# EAGLE board VoltageControlledEuclideanSequencer (EAGLE 6.6.0)
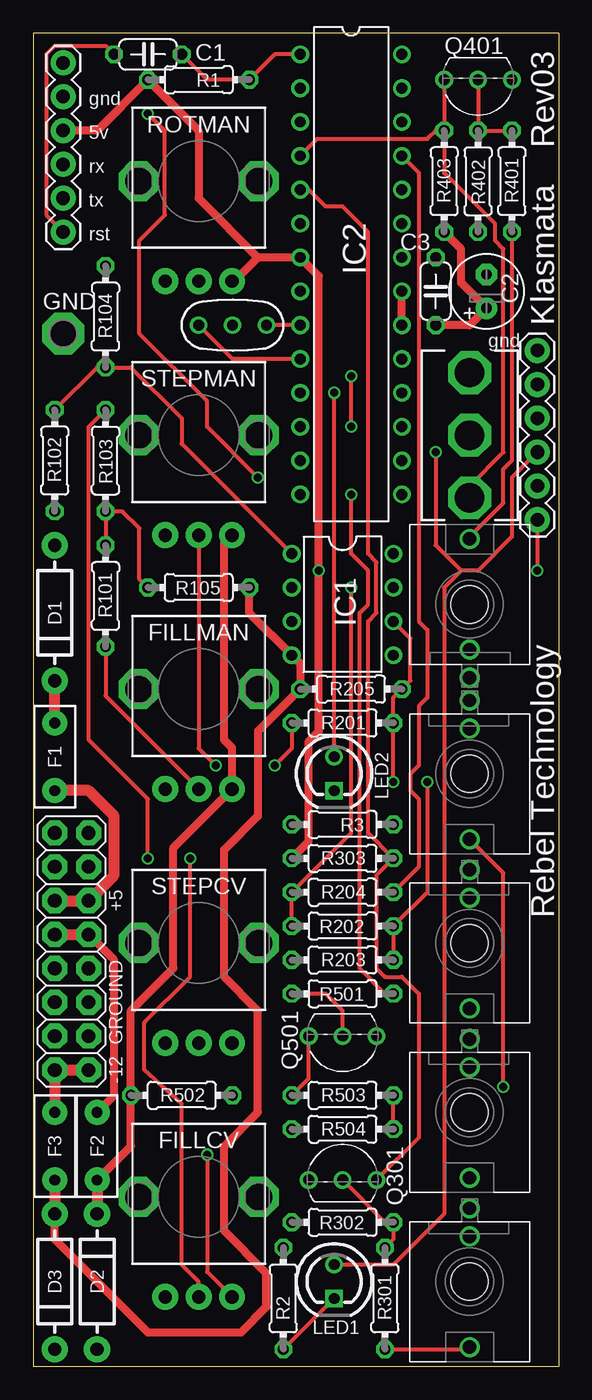
[diagram p0: board, top side]
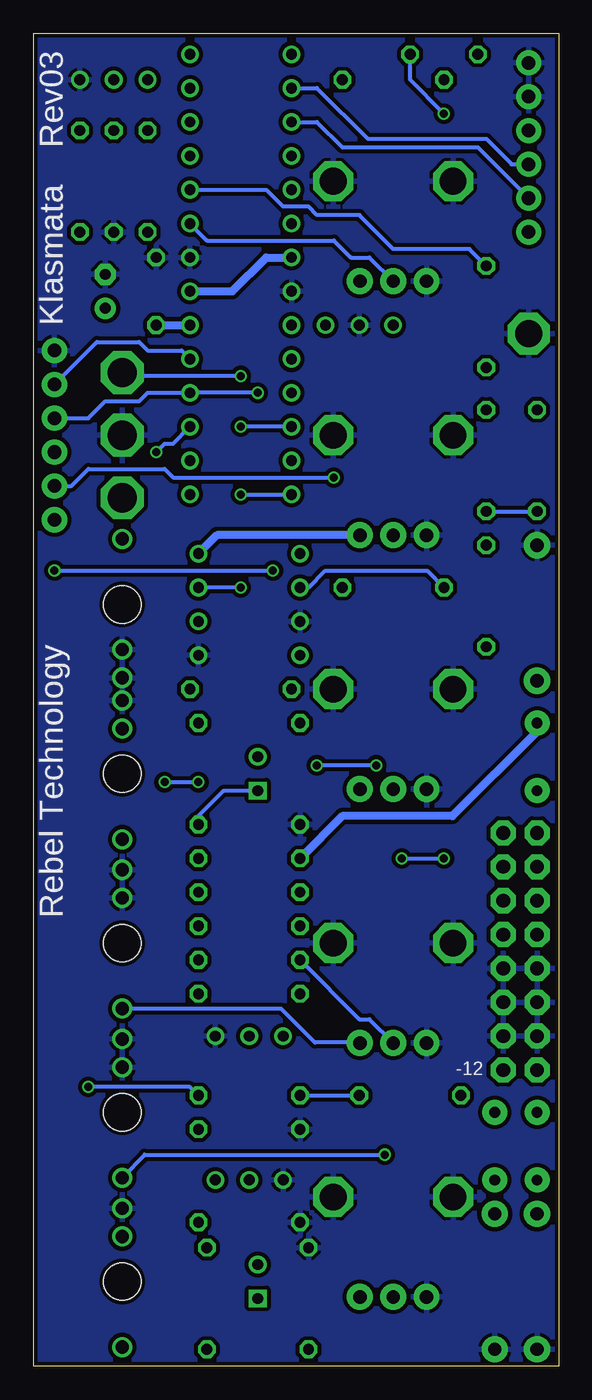
[diagram p1: board, bottom side, seen from below]

Size 39.39 x 100 mm. Coordinates in mm from the lower left corner, seen from the top.
Outline: 39.39,100 0,100 0,0 39.39,0 39.39,100
Copper layers (1*16): Top 0.035mm / dielectric 1.5mm / Bottom 0.035mm
Design rules "Fusion_eagle_rule_v1.1": minimum track width 6mil, minimum drill 12mil, track to track 6mil, track to pad 6mil, pad to pad 6mil, via to via 6mil, smd to smd 0mil, copper to edge 10mil, drill to drill 10mil, minimum pad ring 10mil, minimum via ring 6mil, stop-mask expansion 2mil, vias tented up to drill 100mil, thermal gap 10mil

## Footprints (pad centres in the part's own frame; a part is rotated, then mirrored left to right if it is on the bottom)
C050-024X044 = drill 0.813 octagon: 1 -2.54,0; 2 2.54,0
E2,5-6 = drill 0.813 pad 1.6: + -1.27,0 | drill 0.813 pad 1.6 octagon: - 1.27,0
THONKICONN = drill 1: P$1 0,-5.5; P$2 0,-3.38; P$3 0,4.92 | hole 2.8: 0,0
DIODE-1N4001 = drill 1 pad 1.981: A -5.08,0; C 5.08,0
PTC = drill 0.8 pad 1.88: P$1 -2.54,0; P$2 2.54,0
POT-ALPS-RK09L1140 = drill 1 pad 1.93: 1 -2.5,-7.5; 2 0,-7.5; 3 2.5,-7.5 | drill 2 octagon: P$5 -4.5,0; P$6 4.5,0
P1-20 = drill 2.007 pad 3.15 octagon: TP 0,0
DIL08 = drill 0.813 pad 1.27: 1 -3.81,-3.81; 2 -1.27,-3.81; 3 1.27,-3.81; 4 3.81,-3.81; 5 3.81,3.81; 6 1.27,3.81; 7 -1.27,3.81; 8 -3.81,3.81
DIL28-3 = drill 0.813: 1 -16.51,-3.81; 2 -13.97,-3.81; 3 -11.43,-3.81; 4 -8.89,-3.81; 5 -6.35,-3.81; 6 -3.81,-3.81; 7 -1.27,-3.81; 8 1.27,-3.81; 9 3.81,-3.81; 10 6.35,-3.81; 11 8.89,-3.81; 12 11.43,-3.81; 13 13.97,-3.81; 14 16.51,-3.81; 15 16.51,3.81; 16 13.97,3.81; 17 11.43,3.81; 18 8.89,3.81; 19 6.35,3.81; 20 3.81,3.81; 21 1.27,3.81; 22 -1.27,3.81; 23 -3.81,3.81; 24 -6.35,3.81; 25 -8.89,3.81; 26 -11.43,3.81; 27 -13.97,3.81; 28 -16.51,3.81
1X06 = drill 1.016 pad 1.88: 1 0,0; 2 2.54,0; 3 5.08,0; 4 7.62,0; 5 10.16,0; 6 12.7,0
LED3MM = drill 0.813: A -1.27,0 | drill 0.813 square: K 1.27,0
TO92-EBC = drill 0.813: B 0,-1.27; C 2.54,-1.27; E -2.54,-1.27
0204/7 = drill 0.813 octagon: 1 -3.81,0; 2 3.81,0
SWITCH-SPDT-SALECOM-T8014 = drill 2.2 octagon: 1 0,4.699; 2 0,0; 3 0,-4.699
2X8 = drill 1.016 pad 1.88 octagon: 1 0,0; 2 0,2.54; 3 2.54,0; 4 2.54,2.54; 5 5.08,0; 6 5.08,2.54; 7 7.62,0; 8 7.62,2.54; 9 10.16,0; 10 10.16,2.54; 11 12.7,0; 12 12.7,2.54; 13 15.24,0; 14 15.24,2.54; 15 17.78,0; 16 17.78,2.54
RESONATOR-PTH = drill 0.8: 1 -2.54,0; 2 0,0; 3 2.54,0

## Placement (x,y rotation side)
C1  100n  [C050-024X044]  8.59,98.42 0 top
C2  10u  [E2,5-6]  33.99,80.64 90 top
C3  100n  [C050-024X044]  30.18,80.64 90 top
CLKIN  THONKICONN  [THONKICONN]  32.72,6.35 180 top
D1  [DIODE-1N4001]  1.6,56.52 270 top
D2  [DIODE-1N4001]  4.78,6.35 90 top
D3  [DIODE-1N4001]  1.6,6.35 270 top
DIVOUT  THONKICONN  [THONKICONN]  32.72,44.45 180 top
F1  PTCPTH  [PTC]  1.6,45.72 90 top
F2  PTCPTH  [PTC]  4.78,16.51 270 top
F3  PTCPTH  [PTC]  1.6,16.51 90 top
FILL  THONKICONN  [THONKICONN]  32.72,19.05 180 top
FILLCV  POT-ALPS-RK09L1140  [POT-ALPS-RK09L1140]  12.4,12.7 0 top
FILLMAN  POT-ALPS-RK09L1140  [POT-ALPS-RK09L1140]  12.4,50.8 0 top
GND  TPPAD1-20  [P1-20]  2.24,77.47 0 top
IC1  TL072P  [DIL08]  23.2,57.15 270 top
IC2  MEGA168  [DIL28-3]  23.83,81.92 270 top
JP1  [1X06]  2.24,97.79 270 top
JP3  [1X06]  37.8,76.2 270 top
LED1  [LED3MM]  22.56,6.35 270 top
LED2  [LED3MM]  22.56,44.45 270 top
Q301  [TO92-EBC]  23.2,15.24 0 top
Q401  [TO92-EBC]  33.36,95.25 180 top
Q501  [TO92-EBC]  23.2,23.5 180 top
R1  10K  [0204/7]  12.4,96.52 180 top
R2  1K  [0204/7]  18.75,5.08 90 top
R3  1K  [0204/7]  23.2,40.64 180 top
R101  120K  [0204/7]  5.42,57.78 90 top
R102  51K  [0204/7]  1.6,67.94 90 top
R103  51K  [0204/7]  5.42,67.94 270 top
R104  51K  [0204/7]  5.42,78.74 90 top
R105  120K  [0204/7]  12.4,58.42 180 top
R201  120K  [0204/7]  23.2,48.26 0 top
R202  51K  [0204/7]  23.2,33.02 180 top
R203  51K  [0204/7]  23.2,30.48 0 top
R204  51K  [0204/7]  23.2,35.56 0 top
R205  120K  [0204/7]  23.83,50.8 0 top
R301  100K  [0204/7]  26.37,5.08 90 top
R302  1M  [0204/7]  23.2,10.79 180 top
R303  10K  [0204/7]  23.2,38.1 0 top
R401  100K  [0204/7]  35.9,88.9 90 top
R402  1M  [0204/7]  33.36,88.9 270 top
R403  10K  [0204/7]  30.81,88.9 90 top
R501  1K  [0204/7]  23.2,27.94 180 top
R502  1K  [0204/7]  11.13,20.32 0 top
R503  100  [0204/7]  23.2,20.32 0 top
R504  1K  [0204/7]  23.2,17.78 0 top
ROTMAN  POT-ALPS-RK09L1140  [POT-ALPS-RK09L1140]  12.4,88.9 0 top
RSTIN  THONKICONN  [THONKICONN]  32.72,57.15 0 top
S1  [SWITCH-SPDT-SALECOM-T8014]  32.72,69.85 0 top
STEP  THONKICONN  [THONKICONN]  32.72,31.75 180 top
STEPCV  POT-ALPS-RK09L1140  [POT-ALPS-RK09L1140]  12.4,31.75 0 top
STEPMAN  POT-ALPS-RK09L1140  [POT-ALPS-RK09L1140]  12.4,69.85 0 top
U$1  [RT-LOGO-REBEL-BL]  9.86,59.69 270 top
U$2  M08X2  [2X8]  4.15,22.23 90 top
U$3  [RT-LOGO-TECH-BL]  9.86,72.39 270 top
Y1  16Mhz  [RESONATOR-PTH]  14.94,78.11 180 top

## Library data of the parts
C1 C3 = rcl
C2 = resistor
CLKIN D1-D3 DIVOUT F1-F3 FILL FILLCV FILLMAN LED1 LED2 R1-R3 R101-R105 R201-R205 R301-R303 R401-R403 R501-R504 ROTMAN RSTIN S1 STEP STEPCV STEPMAN U$1 U$3 = Rebel
GND = testpad
IC1 = linear
IC2 = atmel; OC_FARNELL: unknown; OC_NEWARK: unknown
JP1 JP3 U$2 Y1 = SparkFun
Q301 Q401 Q501 = transistor-neu-to92

## Nets
+5V: C2.+ C3.1 D1.C F1.P$2 IC2.7 IC2.20 IC2.21 JP1.3 JP3.6 R1.2 R303.1 R403.1 ROTMAN.3
+12V: D2.C F2.P$2 FILLMAN.3 IC1.8 R502.1 STEPMAN.3
-12V: D3.A F3.P$1 IC1.4 R105.1 R205.1
ALT: IC2.11
CLKIN: IC2.5 Q301.C R303.2
CMBOUT: IC2.16
DELOUT: IC2.15
FILL: IC2.24 R104.2
GND: C2.- C3.2 CLKIN.P$1 D1.A D2.A D3.C DIVOUT.P$1 FILL.P$1 FILL.P$2 FILLCV.1 FILLCV.P$5 FILLCV.P$6 FILLMAN.1 FILLMAN.P$5 FILLMAN.P$6 GND.TP IC1.3 IC1.5 IC2.8 IC2.22 JP1.1 JP1.2 JP3.1 Q301.E Q401.E Q501.E R2.2 R3.2 R302.2 R402.2 R504.1 ROTMAN.1 ROTMAN.P$5 ROTMAN.P$6 RSTIN.P$1 RSTIN.P$2 S1.2 STEP.P$1 STEP.P$2 STEPCV.1 STEPCV.P$5 STEPCV.P$6 STEPMAN.1 STEPMAN.P$5 STEPMAN.P$6 U$2.3 U$2.4 U$2.5 U$2.6 U$2.7 U$2.8 Y1.2
MISO: IC2.18 JP3.3 LED2.A
MODEB: IC2.13
MODEIN: IC2.12 S1.1
MOSI: IC2.17 JP3.4 LED1.A
N$1: FILL.P$3 FILLCV.3
N$2: IC1.2 R101.2 R102.1 R103.2 R105.2
N$3: FILLMAN.2 R101.1
N$4: IC1.1 R102.2 R104.1
N$5: FILLCV.2 R103.1
N$6: F3.P$2 U$2.1 U$2.2
N$7: IC1.6 R201.2 R202.1 R203.2 R205.2
N$8: R201.1 STEPMAN.2
N$9: IC1.7 R202.2 R204.1
N$10: R203.1 STEPCV.2
N$12: STEP.P$3 STEPCV.3
N$15: IC2.26
N$16: IC2.27
N$17: IC2.28
N$20: IC2.9 Y1.1
N$21: IC2.10 Y1.3
N$23: LED1.K R2.1
N$24: LED2.K R3.1
N$27: Q301.B R301.2 R302.1
N$28: CLKIN.P$3 R301.1
N$29: C1.1 JP1.6
N$31: Q401.B R401.2 R402.1
N$33: Q501.B R501.2
N$36: DIVOUT.P$3 R503.2 R504.2
N$37: Q501.C R502.2 R503.1
N$40: R401.1 RSTIN.P$3
N$44: F1.P$1 U$2.11 U$2.12
N$45: F2.P$1 U$2.9 U$2.10
ROT: IC2.23 ROTMAN.2
RST: C1.2 IC2.1 JP3.5 R1.1
RSTIN: IC2.4 Q401.C R403.2 S1.3
RX: IC2.2 JP1.4
SCK: IC2.19 JP3.2
SEQOUT: IC2.14 R501.1
STEP: IC2.25 R204.2
TRIG: IC2.6
TX: IC2.3 JP1.5

## Tracks (layer width: path | path; a pad name or v marks a point on that pad's centre or on a via)
+5V  (via drill 0.6)
  Top 0.305: JP3.6 v37.8,59.69
  Top 0.61: IC2.20 IC2.21 | C3.1 32.72,78.11 C2.+ 32.09,81.28 32.09,83.82 R403.1 | JP1.3 4.78,92.71 R1.2 12.4,92.71 12.4,87.63 16.84,83.19 | 16.84,83.19 IC2.7 21.42,81.79 v21.42,59.69 21.42,47.62 20.65,46.86 20.65,39.37 R303.1 | ROTMAN.3 15.06,81.4 16.84,83.19
  Top 0.813: F1.P$2 D1.C
  Bottom 0.305: v37.8,59.69 v21.42,59.69
  Bottom 0.61: C3.1 IC2.20 | IC2.21 24.46,80.64 21.93,83.19 IC2.7 | F1.P$2 1.6,47.62 7.96,41.27 16.21,41.27 R303.1
+12V
  Top 0.61: F2.P$2 7.32,16.51 R502.1 7.32,26.67 10.49,29.84 10.49,38.9 FILLMAN.3 14.9,46.4 14.3,46.99 14.3,61.76 STEPMAN.3
  Top 0.813: F2.P$2 D2.C
  Bottom 0.61: STEPMAN.3 25.61,62.35 IC1.8
-12V
  Top 0.61: R105.1 16.21,56.52 IC1.4 20.02,52.7 R205.1 16.84,47.62 16.84,41.27 14.3,38.73 14.3,29.21 16.84,26.67 16.84,19.05 14.3,16.51 14.3,10.16 17.48,6.99 17.48,4.45 15.57,2.54 8.59,2.54 1.6,9.53 D3.A
  Top 0.813: F3.P$1 D3.A
CLKIN
  Top 0.305: IC2.5 20.65,88.27 21.93,87 23.2,87 25.1,85.09 25.1,60.96 25.73,60.33 25.73,56.52 25.1,55.88 25.1,40.01 R303.2 25.73,36.83 25.73,29.84 26.37,29.21 27.64,29.21 28.91,27.94 28.91,17.14 Q301.C
FILL
  Bottom 0.305: IC2.24 21.93,88.27 20.65,87 18.75,87 18.11,86.36 14.94,86.36 12.4,83.82 6.69,83.82 R104.2
GND
  pour Bottom (isolate 0.305): 40.34,0 -0.3,0 -0.3,100.33 40.34,100.33
MISO  (via drill 0.6)
  Top 0.305: LED2.A v22.56,73.03
  Bottom 0.305: v22.56,73.03 IC2.18 30.81,73.03 31.45,72.39 33.99,72.39 35.26,71.12 JP3.3
MODEIN  (via drill 0.6)
  Top 0.305: v23.83,70.48 v23.83,74.3
  Bottom 0.305: IC2.12 v23.83,70.48 | v23.83,74.3 32.47,74.3 S1.1
MOSI  (via drill 0.6)
  Top 0.305: LED1.A 27,7.62 30.81,11.43 30.81,58.42 32.09,59.69 | JP3.4 35.9,66.67 35.9,62.23 33.36,59.69 32.09,59.69 | v30.18,68.58 30.18,61.59 32.09,59.69
  Bottom 0.305: v30.18,68.58 29.54,69.22 28.91,69.22 IC2.17
N$1  (via drill 0.6 pad 0.61)
  Top 0.305: v13.04,15.88 13.04,7.07 FILLCV.3
  Bottom 0.305: FILL.P$3 31.04,15.88 v13.04,15.88
N$2
  Top 0.305: R101.2 R103.2 6.69,64.14 7.96,62.87 7.96,59.05 R105.2
  Bottom 0.305: R103.2 R102.1 | IC1.2 18.75,58.42 17.48,59.69 9.86,59.69 R105.2
N$3
  Top 0.305: R101.1 5.42,50.28 FILLMAN.2
N$4
  Top 0.305: R102.2 4.78,74.93 R104.1 7.32,74.93 11.13,71.12 11.13,69.22 IC1.1
N$5  (via drill 0.6 pad 0.61)
  Top 0.305: v8.59,38.1 8.59,42.55 4.15,46.99 4.15,70.48 R103.1 | v11.76,38.1 11.76,29.21 8.34,25.78 8.34,22.23 11.13,19.68 11.13,7.62 12.4,6.35 FILLCV.2
  Bottom 0.305: v11.76,38.1 v8.59,38.1
N$6
  Top 0.813: U$2.1 U$2.2 F3.P$2
N$7  (via drill 0.6)
  Top 0.305: IC1.6 28.27,54.61 28.27,51.44 R205.2 27,50.16 R201.2 v27,43.81 | v29.54,43.81 29.54,35.56 R202.1 R203.2
  Bottom 0.305: v29.54,43.81 v27,43.81
N$8  (via drill 0.6, 0.6 pad 0.61)
  Top 0.305: STEPMAN.2 12.4,46.35 v13.67,45.09 | R201.1 19.38,46.35 v18.11,45.09
  Bottom 0.305: v13.67,45.09 v18.11,45.09
N$9  (via drill 0.6)
  Top 0.305: R202.2 R204.1 23.83,40.01 v23.83,58.42
  Bottom 0.305: v23.83,58.42 IC1.7
N$10
  Bottom 0.305: R203.1 14.94,26.04 14.18,26.04 STEPCV.2
N$12
  Bottom 0.305: STEPCV.3 14.94,24.29 18.27,24.29 20.81,26.83 STEP.P$3
N$20
  Top 0.305: IC2.9 Y1.1
N$21
  Top 0.305: IC2.10 14.94,75.56 Y1.3
N$23
  Top 0.305: R2.1 LED1.K
N$24
  Bottom 0.305: LED2.K 25.1,43.18 27,41.27 R3.1
N$27
  Top 0.305: R301.2 27,9.53 R302.1 26.37,10.79 Q301.B
N$28
  Top 0.305: R301.1 32.25,1.27 CLKIN.P$3
N$29
  Top 0.305: JP1.6 0.97,86.36 0.97,98.42 1.6,99.06 5.42,99.06 C1.1
N$31
  Top 0.305: Q401.B R402.1 R401.2
N$33
  Top 0.305: Q501.B 23.2,26.67 21.93,27.94 R501.2
N$36  (via drill 0.6)
  Top 0.305: R504.2 R503.2 | v35.26,20.95 35.26,36.99 DIVOUT.P$3
  Bottom 0.305: R503.2 27.64,20.95 v35.26,20.95
N$37
  Top 0.305: R503.1 20.65,21.59 Q501.C
  Bottom 0.305: R503.1 R502.2
N$40
  Top 0.305: R401.1 35.9,67.94 35.26,67.31 35.26,64.77 32.72,62.23 RSTIN.P$3
N$44
  Top 0.813: U$2.12 U$2.11 6.05,36.83 6.05,41.27 4.15,43.18 F1.P$1
N$45
  Top 0.61: F2.P$1 6.05,20.32 6.05,30.48 U$2.9
  Top 0.813: U$2.10 U$2.9
ROT
  Bottom 0.305: IC2.23 26.37,84.45 16.84,84.45 15.57,83.19 14.18,83.19 ROTMAN.2
RST  (via drill 0.6)
  Top 0.305: C1.2 13.04,96.52 R1.1 18.11,98.42 IC2.1 | v16.84,66.67 13.04,70.48 13.04,72.39 7.96,77.47 7.96,84.45 9.86,86.36 9.86,92.71 v8.59,93.98
  Bottom 0.305: JP3.5 36.53,66.04 35.26,67.31 29.54,67.31 28.91,66.67 v16.84,66.67 | v8.59,93.98 11.13,96.52 C1.2
RSTIN
  Top 0.305: Q401.C R403.2 | IC2.4 21.29,92.08 29.54,92.08 30.18,92.71 R403.2 | R403.2 30.81,89.53 34.62,85.72 34.62,84.45 35.26,83.82 35.26,68.58 32.72,66.04 S1.3
RX
  Bottom 0.305: IC2.2 18.11,95.89 14.3,92.08 5.42,92.08 3.51,90.17 JP1.4
SCK
  Bottom 0.305: JP3.2 34.62,76.83 31.45,76.83 30.81,76.2 28.27,76.2 IC2.19
SEQOUT  (via drill 0.6)
  Top 0.305: R501.1 26.37,27.94 24.46,29.84 24.46,56.52 25.1,57.15 25.1,59.69 23.83,60.96 v23.83,65.41
  Bottom 0.305: v23.83,65.41 IC2.14
STEP
  Top 0.305: IC2.25 28.91,89.53 28.91,55.88 29.54,55.24 29.54,50.16 28.91,49.53 28.91,45.09 28.27,44.45 28.27,43.18 28.91,42.55 28.91,37.47 R204.2
TX
  Bottom 0.305: IC2.3 18.11,93.34 16.21,91.44 6.05,91.44 JP1.5

## Text on the board
tPlace: gnd | 5v | Rev03 | rx | tx | rst | Klasmata | gnd | +5 | Rebel Technology | GROUND | -12
bPlace: Rev03 | Klasmata | Rebel Technology | -12
bStop: -12